# Altium PCB EpicPlus.PcbDoc
Units mil, origin at the board's own origin, x right, y up, seen from the top; angles counter-clockwise.
Board outline 2600 x 2000 mil, 4 copper layers (Top Layer, GND, PWR, Bottom Layer); 62 components, 102 nets, 280 pads, 141 vias.
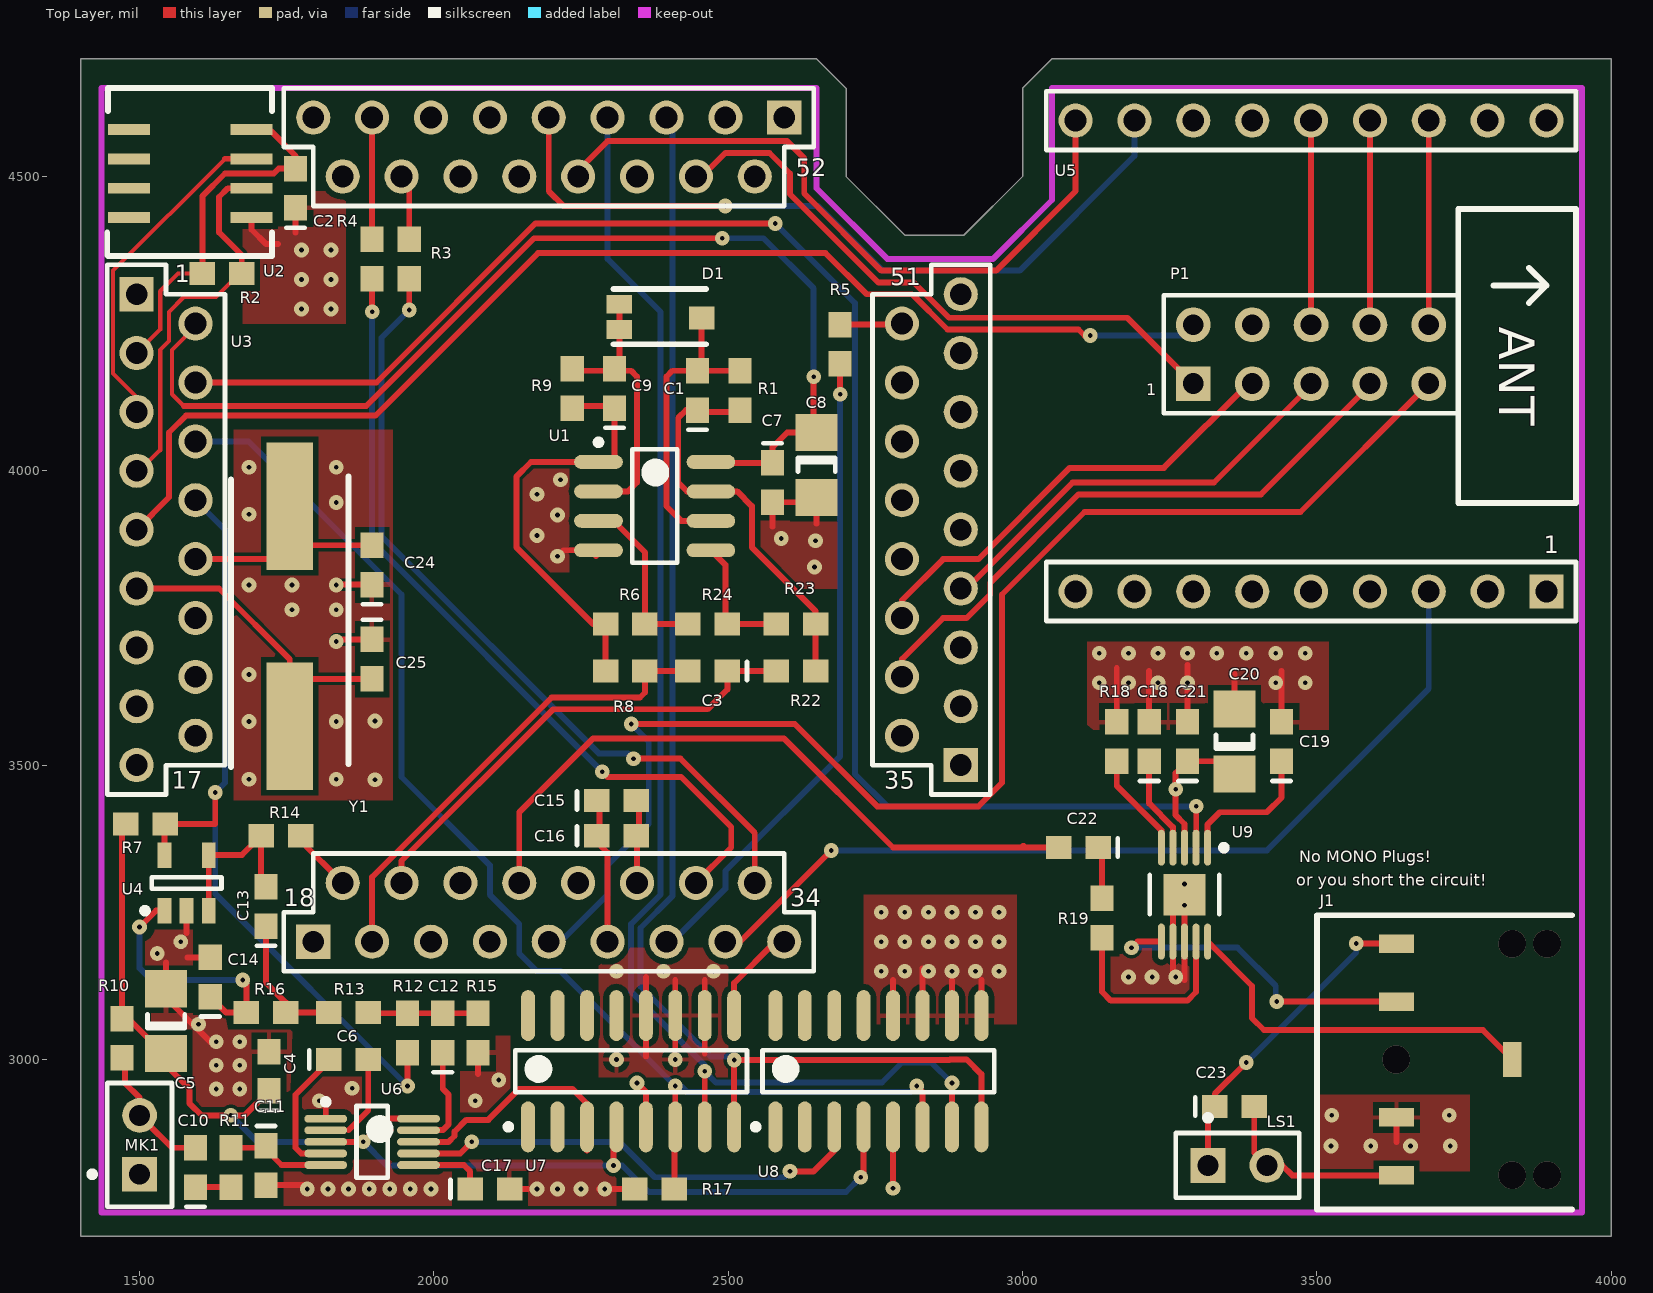
[diagram p0: Top Layer view]
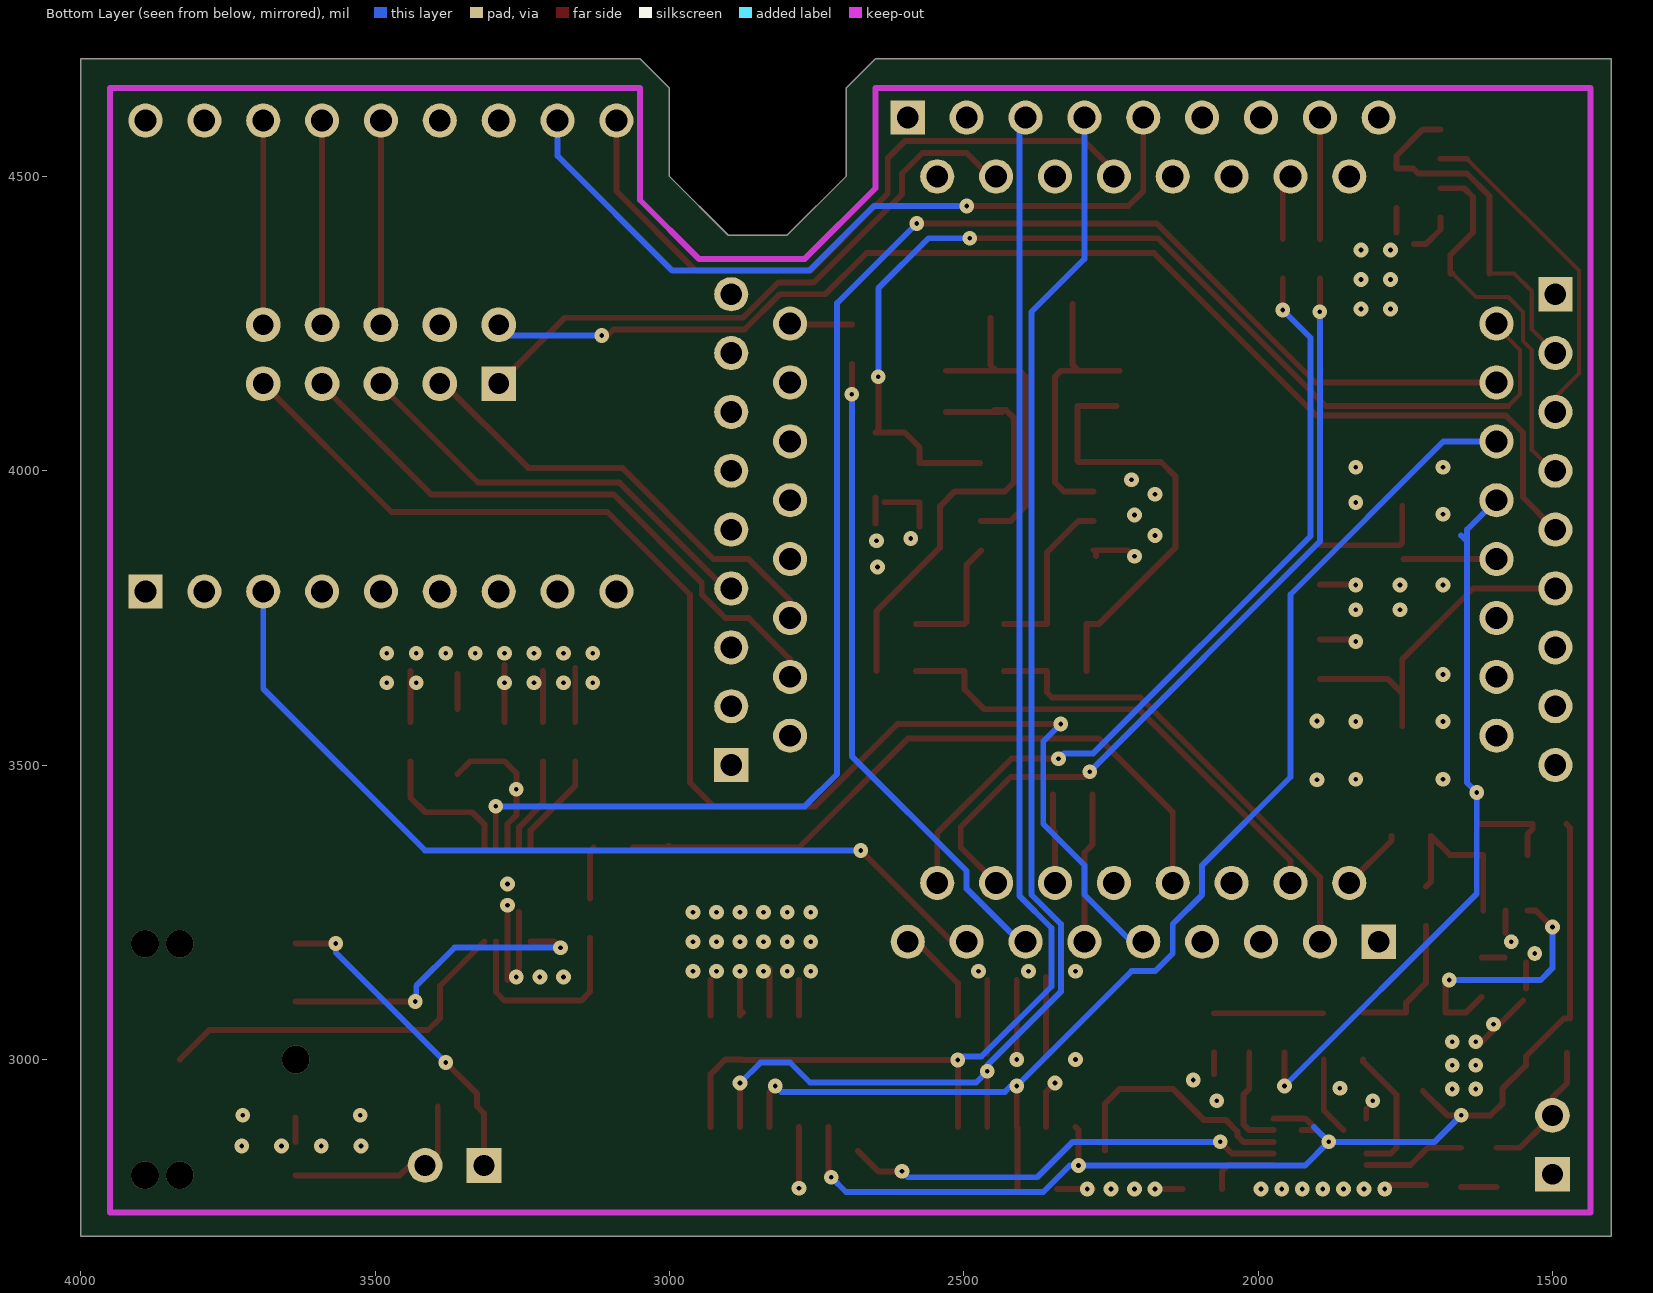
[diagram p1: Bottom Layer view, seen from below]
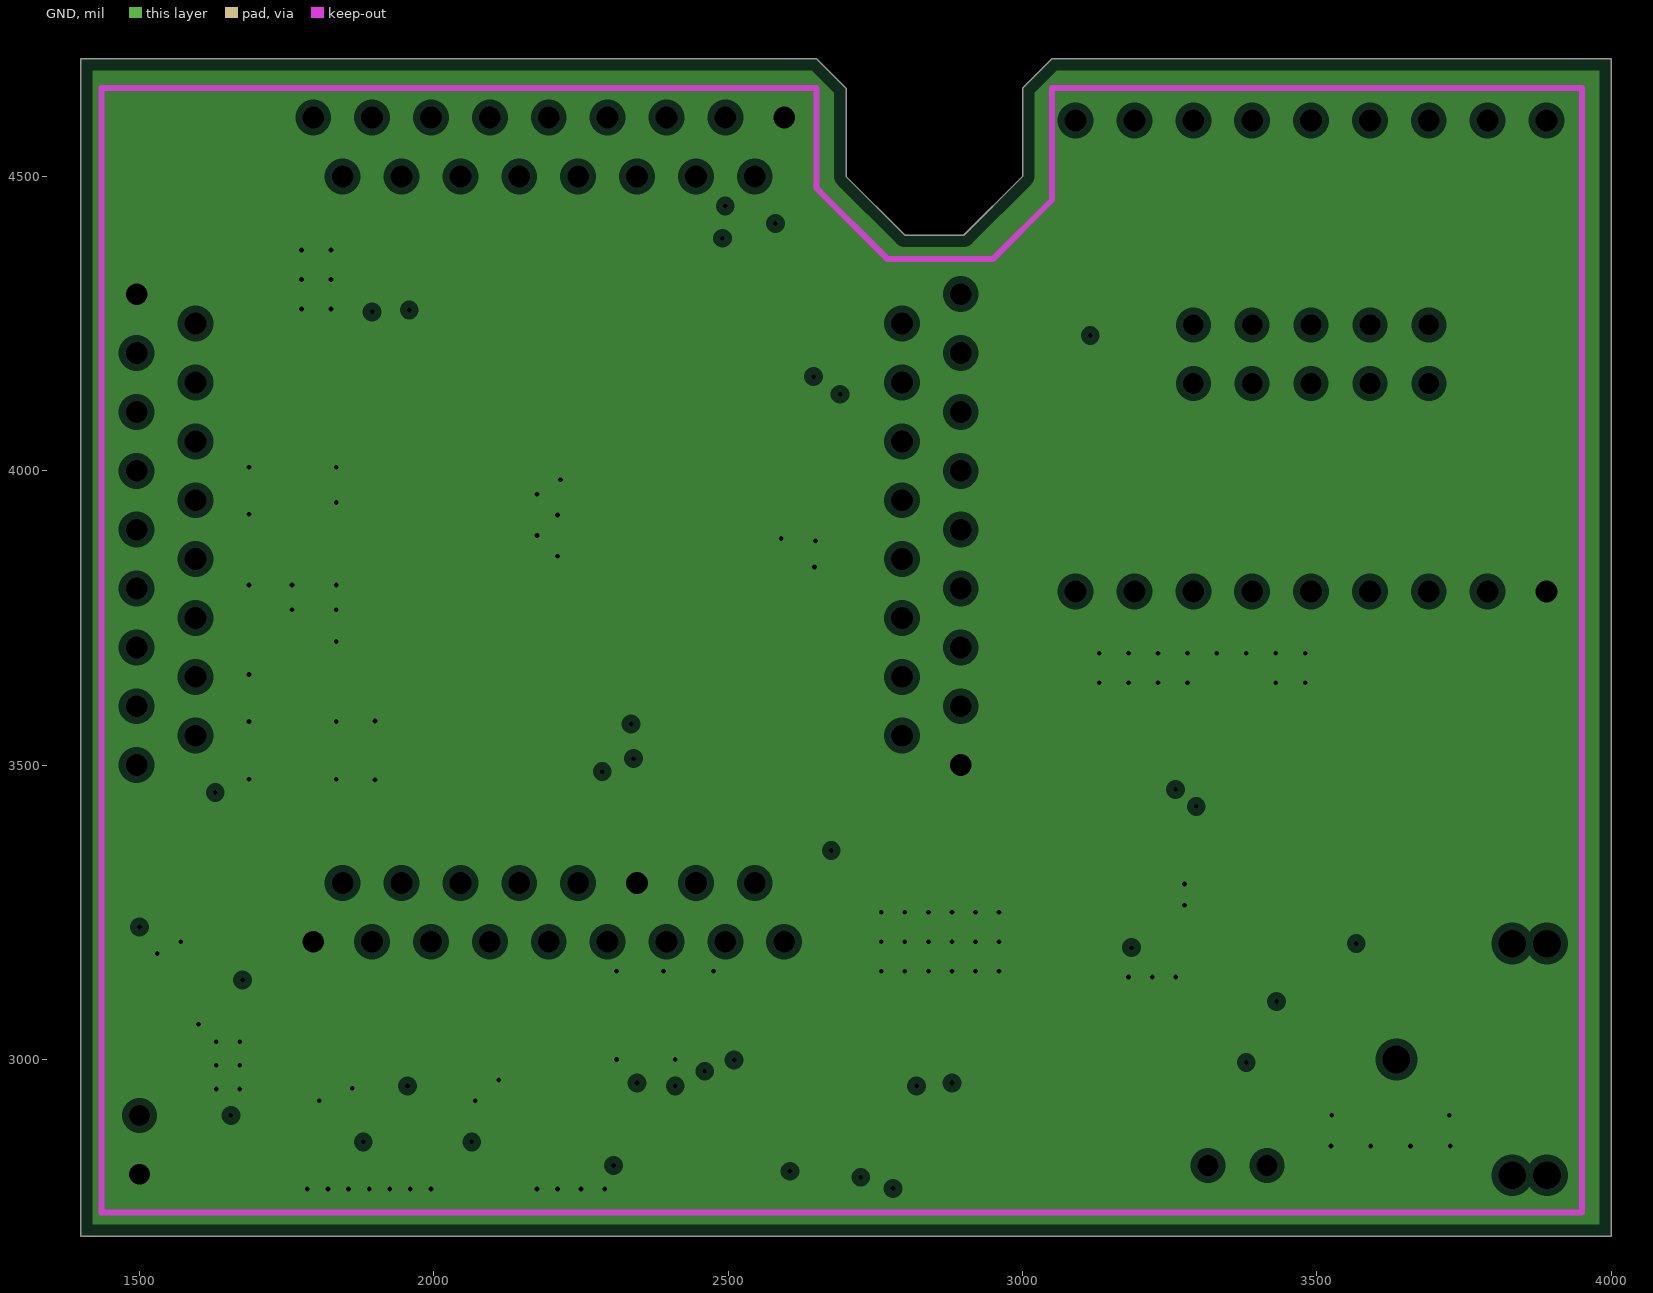
[diagram p2: GND, clearances drawn from the general rule]
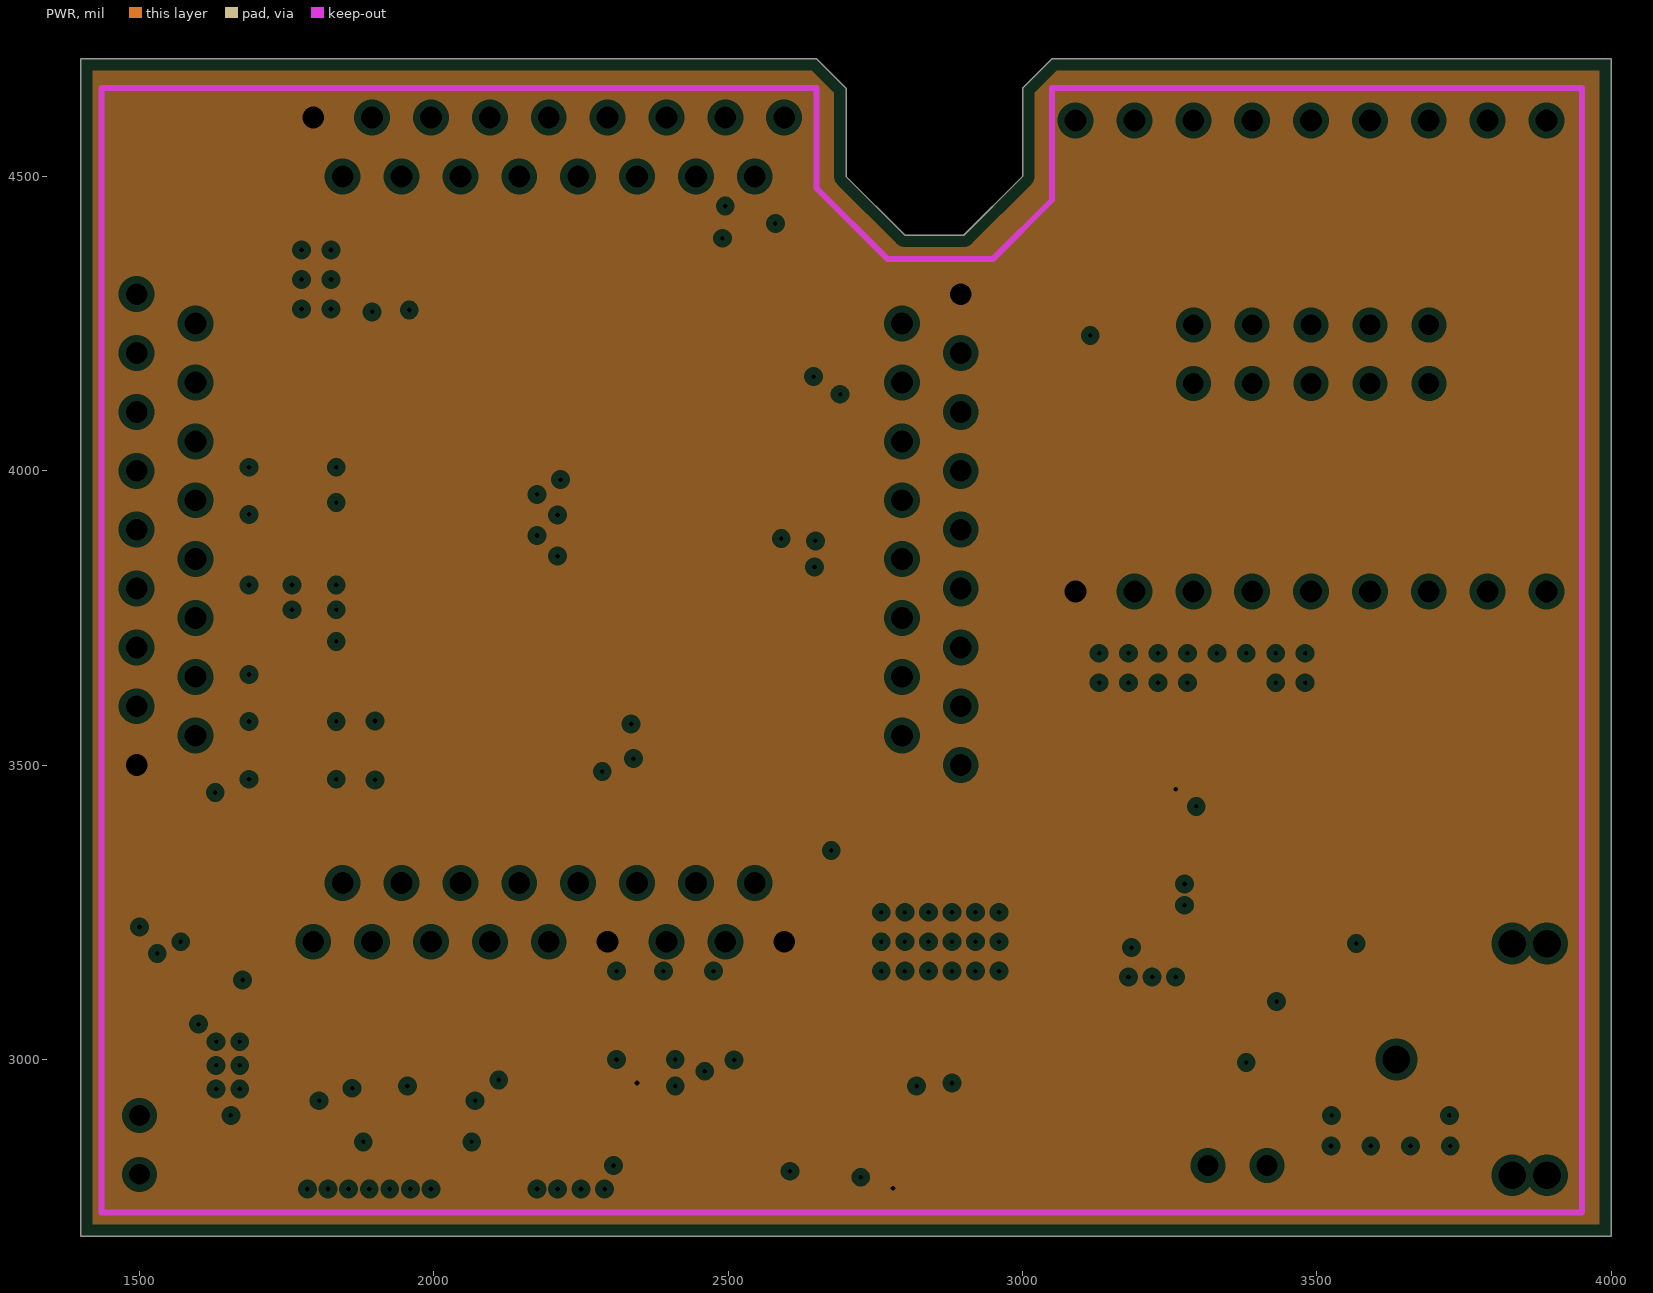
[diagram p3: PWR, clearances drawn from the general rule]

## Layer stack, top to bottom
Top Layer: signal copper 1.4
Dielectric: core 12.6, FR-4, Dk 4.8
GND: plane copper 1.4, net GND
Dielectric: prepreg 12.6, FR-4, Dk 4.8
PWR: plane copper 1.4, net AVDD_EPIC
Dielectric: core 12.6, FR-4, Dk 4.8
Bottom Layer: signal copper 1.4

## Board outline
1400,2700 1400,4700 2650,4700 2700,4650 2700,4500 2800,4400 2900,4400 3000,4500 3000,4650 3050,4700 4000,4700 4000,2700

## Design rules (kind name [scope] priority, off if disabled: settings)
Clearance "Clearance Polygon" [InPolygon vs isPad] p1: gap=10
Clearance "Clearance~Sunstone Circuits" [All] p2: gap=6 // Sunstone Circuits Minimum Clearance Rule (MLB~4&6 Layer Designs)
ComponentClearance [All] p1: gap=10 collisioncheckmode=3 verticalgap=10
HoleSize "HoleSize~Sunstone Circuits" [All] p1: absolutevalues=TRUE maxlimit=251 minlimit=8 maxpercent=80.000 minpercent=20.000 // Sunstone Circuits Hole Size Rule (MLB~4&6 Layer Designs)
MinimumAnnularRing "MinimumAnnularRing~Sunstone Circuits" [All] p1: minimumring=7 // Sunstone Circuits Minimum Annular Ring (MLB~4&6 Layer Designs)
PlaneClearance "PlaneClearance~Sunstone Circuits" [All] p1: clearance=12 // Sunstone Circuits Power Plane Clearance Rule (MLB~4&6 Layer Designs)
PlaneConnect "PlaneConnect~Sunstone Circuits" [All] p1: planeconnectstyle=Relief reliefexpansion=10 reliefentries=4 reliefconductorwidth=8 reliefairgap=10 // Sunstone Circuits Power Plane Connect Rule (MLB~4&6 Layer Designs)
PolygonConnect [isVia] p1: connectstyle=Direct reliefconductorwidth=10 reliefentries=4 polygonreliefangle="90 Angle"
PolygonConnect "PolygonConnect~Sunstone Circuits" [All] p2: connectstyle=Relief reliefconductorwidth=8 reliefentries=4 polygonreliefangle="90 Angle" // Sunstone Circuits Polygon Connect Style (MLB~4&6 Layer Designs)
RoomDefinition MainBoard [InComponentClass('MainBoard')] p1: confinementstyle=ConfineIn formatcopy=TRUE lockcomponents=FALSE outline 1300,2600 4085,2600 4085,4755 1300,4755
RoutingVias "RoutingVias~Sunstone Circuits" [All] p1: holewidth=8 width=25 viastyle="Through Hole" minholewidth=8 minwidth=24 maxholewidth=20 maxwidth=40 // Sunstone Circuits Routing Vias Rule (MLB~4&6 Layer Designs)
ShortCircuit "ShortCircuit~Sunstone Circuits" [All] p1: allowed=FALSE // Sunstone Circuits Short Circuit Rule~Do Not Allow (MLB~4&6 Layer Designs)
SolderMaskExpansion "SolderMaskExpansion~Sunstone Circuits" [All] p1: expansion=3 // Sunstone Circuits Solder Mask Expansion Rule (MLB~4&6 Layer Designs)
TestPointUsage [All] p1: valid=0 allowmultiple=FALSE
Testpoint [All] p1: side=15 testpointundercomponent=TRUE minsize=40 maxsize=100 preferedsize=60 minholesize=0 maxholesize=40 preferedholesize=32 testpointgrid=1 style=1023 order=0-112345678
ViasUnderSMD "ViasUnderSMD~Sunstone Circuits" [All] p1: allowed=FALSE // Sunstone Circuits Vias Under SMD~Do Not Allow (MLB~4&6 Layer Designs)
Width "Width~Sunstone Circuits" [All] p1: maxlimit=100 minlimit=6 preferedwidth=10 // Sunstone Circuits Minimum Width Rule (MLB~4&6 Layer Designs)
14 further rules are at their usual default settings.

## Components (designator, comment, footprint, x,y, rotation, side; value= is the part's Value field where it differs from the comment)
C1 "Cap" CC1608-0603 2448,4136.54 r90 top
C2 "Cap" CC1608-0603 1765,4480 r90 top
C3 "Cap" CC1608-0603 2465,3660 r180 top
C4 "Cap" CC1608-0603 1720,2980 r90 top
C5 "Cap2" CC3216-1206 1545,3065 r90 top
C6 "Cap2" CC1608-0603 1855,3000 r0 top
C7 "Cap" CC1608-0603 2575,3980 r270 top
C8 "Cap2" CC3216-1206 2650,4010 r270 top
C9 "Cap" CC1608-0603 2307,4140 r90 top
C10 "Cap" CC1608-0603 1595,2816.54 r90 top
C11 "Cap" CC1608-0603 1715,2820 r270 top
C12 "Cap2" CC1608-0603 2015,3045 r90 top
C13 "Cap" CC1608-0603 1715,3260 r90 top
C14 "Cap" CC1608-0603 1620,3140 r90 top
C15 "Cap" CC1608-0603 2310,3440 r0 top
C16 "Cap2" CC1608-0603 2310,3380 r0 top
C17 "Cap2" CC1608-0603 2095,2780 r0 top
C18 "Cap2" CC1608-0603 3215,3540 r90 top
C19 "Cap2" CC1608-0603 3440,3540 r90 top
C20 "Cap2" CC3216-1206 3360,3540 r90 top
C21 "Cap" CC1608-0603 3280,3540 r90 top
C22 "Cap" CC1608-0603 3095,3360 r180 top
C23 "Cap" CC1608-0603 3360,2920 r0 top
C24 "Cap" CC1608-0603 1895,3840 r90 top
C25 "Cap" CC1608-0603 1895,3680 r270 top
D1 "VISHAY/TEMD6010FX01" VISHAY/TEMD6010FX01 2315,4240 r0 top
J1 "CUI/SJ1-3525NG" CUI/PHONE_JACK_3.5mm 3635,3000 r180 top
LS1 "Speaker" PIN2 3315,2820 r0 top
MK1 "Mic2" PIN2 1500,2805 r90 top
P1 "Header 5X2" HDR2X5 3290,4148 r0 top
R1 "Res3" CR1608-0603 2520,4136.54 r270 top
R2 "Res3" CR1608-0603 1640,4335 r0 top
R3 "Res3" CR1608-0603 1958,4360 r90 top
R4 "Res3" CR1608-0603 1895,4360 r270 top
R5 "Res3" CR1608-0603 2690,4215 r270 top
R6 "Res3" CR1608-0603 2325,3740 r0 top
R7 "Res3" CR1608-0603 1510,3400 r0 top
R8 "Res3" CR1608-0603 2325,3660 r180 top
R9 "Res3" CR1608-0603 2235,4140 r270 top
R10 "Res3" CR1608-0603 1470,3036 r270 top
R11 "Res3" CR1608-0603 1655,2816.54 r270 top
R12 "Res3" CR1608-0603 1955,3045 r90 top
R13 "Res3" CR1608-0603 1855,3080 r180 top
R14 "Res3" CR1608-0603 1740,3380 r0 top
R15 "Res3" CR1608-0603 2075,3045 r270 top
R16 "Res3" CR1608-0603 1715,3080 r180 top
R17 "Res3" CR1608-0603 2375,2780 r180 top
R18 "Res3" CR1608-0603 3160,3540 r270 top
R19 "Res3" CR1608-0603 3135,3240 r270 top
R22 "Res3" CR1608-0603 2615,3660 r0 top
R23 "Res3" CR1608-0603 2615,3740 r180 top
R24 "Res3" CR1608-0603 2465,3740 r0 top
U1 "Microchip/MCP6042" SOIC127P600X175-8N 2375,3940 r0 top
U2 "SHT11" Sensirion/SHT11 1690,4580 r180 top
U3 "Epic Mote Compact" UCB/Epic_Quanto_Header 1445,4350 r0 top
U4 "LMV321M5" SOT23127P600-8N 1580,3300 r90 top
U5 "SparkFun/Breakout_WRL-084" SparkFun/Breakout_WRL-084 3940,4645 r180 top
U6 "AD/SSM2167" MSOP127P600-8N 1895,2860 r0 top
U7 "AD/AD5242" SOIC127P600X175-16N 2335,2980 r90 top
U8 "AD/AD5242" SOIC127P600X175-16N 2755,2980 r90 top
U9 "TI/TPA0233" TSSOP50P480X107_HS-10N 3275,3280 r270 top
Y1 "CRYSTAL_0" ECS/CSM-7SSX 1755,3940 r270 top

## Footprints (in the part's own frame and the unit in brackets; to place one, negate y for a bottom-side part, rotate by r counter-clockwise, add the part's x,y. Pads: shape width x height; smd on the part's side, far side on the other; paste and mask are expansions set on the pad)
CC1608-0603 [mm] "Chip Capacitor; Body 1.6 x 0.8 mm (LxW typ)"
  rect 1.1x1 smd: 1(-0.85,0) 2(0.85,0)
  silkscreen extent -1.7,-0.4 -1.7,0.4
CC3216-1206 [mm] "Chip Capacitor; Body 3.2 x 1.6 mm (LxW typ)"
  rect 1.6x1.8 smd: 1(-1.4,0) 2(1.4,0)
  silkscreen extent -0.3,-0.8 0.3,0.8
CR1608-0603 [mm] "Chip Resistor; Body 1.6 x 0.8 mm (LxW typ)"
  rect 1.1x1 smd: 1(-0.85,0) 2(0.85,0)
CUI/PHONE_JACK_3.5mm [mm] "3.5mm Audio Jack Stereo"
  rect 0.8x1.5 smd: 1(-5,0)
  rect 1.5x0.8 smd: 2(0,-5) 3(0,5) 4(0,-2.5) 5(0,2.5)
  silkscreen extent -7.57,-6.22 3.43,6.48
ECS/CSM-7SSX [mm] "Low Profile SMD Crystal from ECS"
  rect 5.5x2 smd: 1(0,0) 2(9.5,0)
  silkscreen extent -1.27,-2.54 11.26,2.54
HDR2X5 [mm] "Connector; Header; 5x2 Position"
  rect 1.5x1.5 hole 0.9: 1(0,0)
  round 1.5 hole 0.9: 2(0,2.54) 3(2.54,0) 4(2.54,2.54) 5(5.08,0) 6(5.08,2.54) 7(7.62,0) 8(7.62,2.54) 9(10.16,0) 10(10.16,2.54)
  silkscreen extent -1.27,-1.27 11.43,3.81
MSOP127P600-8N [mm] "For AD SSM2167"
  oval 1.85x0.332 smd: 1(-2,1) 2(-2,0.5) 3(-2,0) 4(-2,-0.5) 5(-2,-1) 6(2,-1) 7(2,-0.5) 8(2,0) 9(2,0.5) 10(2,1)
  silkscreen extent -2.12,-1.55 0.67,1.85, body extent -1.55,-1.55 1.55,1.55, height 1.1
PIN2 [mm] "Photosensitive Diode; 2 Leads"
  rect 1.5x1.5 hole 0.9: 1(0,0)
  round 1.5 hole 0.9: 2(2.54,0)
  silkscreen extent -1.4,-1.4 3.94,2.17
Sensirion/SHT11 [mm] "Sensirion SHT11 footprint"
  rect 1.8x0.47 smd: 1(0,3.81) 2(0,2.54) 3(0,1.27) 4(0,0) NC(5.28,3.81) NC(5.28,0) NC(5.28,1.27) NC(5.28,2.54)
  silkscreen extent -0.89,-1.78 6.22,5.46
SOIC127P600X175-8N [mm] "SOIC, 8-Leads, Body 4.9x3.9mm (max), Pitch 1.27mm, IPC Medium Density, for Microchip MCP6042"
  oval 2.1x0.6 smd: 1(-2.425,1.905) 2(-2.425,0.635) 3(-2.425,-0.635) 4(-2.425,-1.905) 5(2.425,-1.905) 6(2.425,-0.635) 7(2.425,0.635) 8(2.425,1.905)
  silkscreen extent -2.55,-2.45 0.98,2.88, body extent -1.95,-2.45 1.95,2.45, height 1.75
SOIC127P600X175-16N [mm] "SOIC, 16-Leads, Body 10.0x4.0mm (max), Pitch 1.27mm, IPC Medium Density, AD5242"
  oval 2.2x0.6 smd: 1(-2.4,4.445) 2(-2.4,3.175) 3(-2.4,1.905) 4(-2.4,0.635) 5(-2.4,-0.635) 6(-2.4,-1.905) 7(-2.4,-3.175) 8(-2.4,-4.445) 9(2.4,-4.445) 10(2.4,-3.175) 11(2.4,-1.905) 12(2.4,-0.635) 13(2.4,0.635) 14(2.4,1.905) 15(2.4,3.175) 16(2.4,4.445)
  silkscreen extent -2.52,-5 0.9,5.42, body extent -2,-5 2,5, height 1.75
SOT23127P600-8N [mm] "for TI LMV931 SOT-23-DBV package"
  rect 1.1x0.6 smd: 1(-1.2,0.95) 2(-1.2,0) 3(-1.2,-0.95) 4(1.2,-0.95) 5(1.2,0.95)
  silkscreen extent -1.32,-1.5 0.25,1.92, body extent -0.87,-1.52 0.87,1.53, height 1.45
SparkFun/Breakout_WRL-084 [mil] "Two 9 pin headers, 800mil spacing for SparkFun WRL-084 bluetooth module"
  rect 58x58 / inner round 60 / far side rect 58x58 hole 37: 1(50,850)
  round 58 / inner round 60 / far side round 58 hole 37: 2(150,850) 3(250,850) 4(350,850) 5(450,850) 6(550,850) 7(650,850) 8(750,850) 9(850,850) 10(850,50) 11(750,50) 12(650,50) 13(550,50) 14(450,50) 15(350,50) 16(250,50) 17(150,50) 18(50,50)
  silkscreen extent 0,0 900,900
TSSOP50P480X107_HS-10N [mm] "TSSOP, 10-Leads, Body 3.0x3.0mm (max), Pitch 0.50mm, IPC Medium Density, for TI/TPA0233"
  oval 1.55x0.3 smd: 1(-2.025,1) 2(-2.025,0.5) 3(-2.025,0) 4(-2.025,-0.5) 5(-2.025,-1) 6(2.025,-1) 7(2.025,-0.5) 8(2.025,0) 9(2.025,0.5) 10(2.025,1)
  rect 1.8x1.8 smd: 11(0,0)
  silkscreen extent -2.15,-1.5 0.85,1.83, body extent -1.53,-1.53 1.53,1.53, height 1.07
UCB/Epic_Quanto_Header [mil] "Header to connect to the Epic Quanto Testbed Board"
  rect 58x58 / inner round 60 / far side rect 58x58 hole 37: 1(50,-50) 18(350,-1150) 35(1450,-850) 52(1150,250)
  round 58 / inner round 60 / far side round 58 hole 37: 2(150,-100) 3(50,-150) 4(150,-200) 5(50,-250) 6(150,-300) 7(50,-350) 8(150,-400) 9(50,-450) 10(150,-500) 11(50,-550) 12(150,-600) 13(50,-650) 14(150,-700) 15(50,-750) 16(150,-800) 17(50,-850) 19(400,-1050) 20(450,-1150) 21(500,-1050) 22(550,-1150) 23(600,-1050) 24(650,-1150) 25(700,-1050) 26(750,-1150) 27(800,-1050) 28(850,-1150) 29(900,-1050) 30(950,-1150) 31(1000,-1050) 32(1050,-1150) 33(1100,-1050) 34(1150,-1150) 36(1350,-800) 37(1450,-750) 38(1350,-700) 39(1450,-650) 40(1350,-600) 41(1450,-550) 42(1350,-500) 43(1450,-450) 44(1350,-400) 45(1450,-350) 46(1350,-300) 47(1450,-250) 48(1350,-200) 49(1450,-150) 50(1350,-100) 51(1450,-50) 53(1100,150) 54(1050,250) 55(1000,150) 56(950,250) 57(900,150) 58(850,250) 59(800,150) 60(750,250) 61(700,150) 62(650,250) 63(600,150) 64(550,250) 65(500,150) 66(450,250) 67(400,150) 68(350,250)
  silkscreen extent 0,-1200 1500,300
VISHAY/TEMD6010FX01 [mm] "Ambient Light Sensor"
  rect 1.1x0.8 smd: 1(0,0) 1(0,1.1)
  rect 1.1x1 smd: 2(3.55,0.5)
  silkscreen extent -0.25,-0.64 3.75,1.75

## Part data
C1 C2 C3 C4 C5 C6 C7 C8 C9 C10 C11 C12 C13 C14 C15 C16 C17 C18 C19 C20 C21 C22 C23 C24 C25: "Capacitor"
LS1: "Loudspeaker"
MK1: "Microphone"
P1: "Header, 5-Pin, Dual row"
R1 R2 R3 R4 R5 R6 R7 R8 R9 R10 R11 R12 R13 R14 R15 R16 R17 R18 R19 R22 R23 R24: "Resistor"
U4: "Single General-Purpose, Low-Voltage Rail-to-Rail Output Operational Amplifier"

## Free pads (board coordinates)
  round 25 hole 8: 13(1530,3180) 13(1570,3200)

## Via types
v1: diameter 25, hole 8, Top Layer to Bottom Layer, 136 vias
v2: diameter 47, hole 47, Top Layer to Bottom Layer, 5 vias

## Nets (pads, with @x,y where several pads share a name; then routed paths per layer and width w, separated by ;. In a path a pad name is that pad's centre, name@x,y a point inside that pad or via, vN(x,y) a via of type N, cw(c..) or ccw(c..) an arc to the next point about the centre after c; other vN are vias at no path point)
ADC0_EPIC: R14.2 U3.19 | length 109.6
  Top Layer w10: R14.2 1773.46,3371.54 U3.19
ADC1_EPIC: C3.2 R8.1 U3.20 | length 812.9
  Top Layer w10: U3.20 1895,3310 2200,3615 2350,3615 2358.46,3623.46 R8.1 C3.2
ADC2_EPIC: C3.1 R22.1 U3.21 | length 826
  Top Layer w10: U3.21 1945,3337.37 2202.63,3595 2465,3595 2498.46,3628.46 C3.1 R22.1
ADC3_EPIC: U3.22
ADC4_EPIC: U3.23
ADC5_EPIC: U3.24
ADC6_EPIC: C22.2 U3.25 | length 1165.9
  Top Layer w10: U3.25 2145,3420 2270,3545 2595,3545 2780,3360 C22.2 ; 3001,3363 3002,3363
ADC7_EPIC: P1.9 U3.26 | length 2362.4
  Top Layer w10: v1(2335,3570) 2613,3570 2753,3430 2925,3430 2965,3470 2965,3790 3105,3930 3472,3930 P1.9
  Bottom Layer w10: U3.26 2215,3200 2295,3280 2295,3330 2365,3400 2365,3540 v1(2335,3570)
ATEST1_EPIC: U3.46
ATEST2_EPIC: U3.47
AVDD_EPIC: C15.1 C16.1 C20.1 C21.1 U3.17 U3.28 U3.34 U3.51 U3.68 U5.9 U7.5 U7.9 U8.5 U9.3 | length 860.6
  Top Layer w10: C15.1@2281.54,3450 2281.54,3440 2281.54,3380 2281.54,3365 2295,3351.54 U3.28 ; v1(2345,2960) 2360,2945 U7.5 ; U7.9 2510,3130 2580,3200 U3.34 ; v1(2780,2781) U8.5 ; U9.3 3275,3400 3260,3415 3260,3486.54 C21.1 3338.35,3506.54 C20.1
  other v1: 3260,3458.88
CTS_BT: U5.13
FLASH_CS_EPIC: U3.36
FLASH_WP_EPIC: U3.37
GND: C2.1 C4.2 C5.2 C7.2 C8.2 C11.2 C14.2 C15.2 C16.2 C17.2 C18.2 C19.2 C20.2 C21.2 C24.1 C25.1 J1.5 MK1.1 pad.13 R15.2 R17.2 R18.1 U1.4 U2.1 U3.1 U3.18 U3.29 U3.35 U3.52 U4.2 U5.1 U6.1 U7.10 U7.11 U7.12 U8.9 U8.10 U8.11 U8.12 U9.7 U9.8 U9.11 | length 2385.6
  Top Layer w10: C5.2 1545,3165 ; C5.2@1550,3100 v1@1620,3030 ; 1580,3215 U4.2 ; 1581.54,3173.46 C14.2 ; U2.1 1690,4410 1715,4385 1735,4385 ; C11.2 v1@1778.46,2786.54 ; 1765,4405 C2.1 ; U6.1 1816.26,2916.26 ; v1@1833.46,3713.46 C25.1 ; v1@1833.46,3806.54 C24.1 ; 2075,2975 R15.2 ; C17.2 2160,2780 ; 2220,3865 U1.4 ; U1.4@2275,3855 U1.4@2275,3860.47 ; v1@2280,2780 R17.2 ; U3.29 2345,3386.54 2348.46,3390 C15.2@2348.46,3450 ; 2360,3005 2360,3140 ; v1(2410,3000) 2410,3135 ; 2460,3010 2460,3135 ; 2575,3905 C7.2 C8.2@2635,3946.54 ; 2650,3910 C8.2 ; U8.12 2780,3135 ; U8.11 v1@2830,3155 ; U8.10@2875,3079.49 U8.10@2880,3084.49 ; U8.10 2880,3135 ; U8.9 2930,3135 ; R18.1 3160,3665 ; C18.2 3215,3660 ; v1@3255.32,3135.32 U9.11@3255.32,3250.32 ; 3275,3135 U9.11@3275,3246 ; C21.2 3280,3670 ; C20.2 3360,3655 ; C19.2 3440,3660 ; 3635,2860 J1.5
  other v1: 1785,2780 1820,2780 1855,2780 1890,2780 1925,2780 1960,2780 1995,2780 2175,2780 2210,2780 2250,2780 2290,2780 3524,2853 3591.5,2853 3659,2853 3726.5,2853 3525,2905 3725,2905 1805,2930 2070,2930 1630,2950 1670,2950 1861,2951 2110,2965 1630,2990 1670,2990 2310,3000 1630,3030 1670,3030 1600,3060 3180,3140 3220,3140 3260,3140 2310,3150 2390,3150 2475,3150 2760,3150 2800,3150 2840,3150 2880,3150 2920,3150 2960,3150 2760,3200 2800,3200 2840,3200 2880,3200 2920,3200 2960,3200 2760,3250 2800,3250 2840,3250 2880,3250 2920,3250 2960,3250 3275,3262 3275,3298 1900,3475 1686,3476 1834,3476 1686,3574 1834,3574 1900,3575 3130,3640 3180,3640 3230,3640 3280,3640 3430,3640 3480,3640 1686,3654 3130,3690 3180,3690 3230,3690 3280,3690 3330,3690 3380,3690 3430,3690 3480,3690 1834,3709.99 1759,3764 1834,3764 1686,3806 1759,3806 1834,3806 2646.66,3836.66 2210,3855 2648.07,3881 2590,3885 2175,3890 2210,3925 1686,3926 1834,3946 2175,3960 2215,3985 1686,4006 1834,4006 1775,4275 1825,4275 1775,4325 1825,4325 1775,4375 1825,4375
HUM_ON: C2.2 R2.1 U2.4 U3.3 | length 630.1
  Top Layer w7: U3.3 1535,4240 1535,4305 1565,4335 R2.1
  Top Layer w10: R2.1 1606.54,4466.54 1645,4505 1727.97,4505 1736.43,4513.46 C2.2 1765,4535 1720,4580 U2.4
HUM_SCL: U2.3 U3.5 | length 572.3
  Top Layer w7: U3.5@1500,4100 1500,4120 1455,4165 1455,4340 1645,4530
  Top Layer w10: 1645,4530 U2.3
HUM_SDA: R2.2 U2.2 U3.7 | length 648.2
  Top Layer w7: U3.7@1500,4000 1535,4035 1535,4205.51 1550,4220.51 1550,4270 1575,4295 1630,4295 R2.2@1670,4335
  Top Layer w10: R2.2@1670,4335 R2.2 1673.46,4366.54 1635,4405 1635,4465 1650,4480 U2.2
I2C0/SPI0_EPIC: U3.53
LED1_EPIC: R3.2 U3.65 | length 111.9
  Top Layer w10: U3.65 1958,4487 R3.2
LED2_EPIC: R4.1 U3.66 | length 206.5
  Top Layer w10: R4.1 U3.66
LED3_EPIC: U3.67
MIC_ON: R7.2 R12.1 U3.8 U4.5 | length 1433.5
  Top Layer w10: U4.5 1542.6,3382.4 1533.46,3391.54 1533.46,3400 1628.46,3400 v1(1628.46,3453.46) ; v1(1955,2955) R12.1
  Bottom Layer w10: U3.8 1645,3900 1645,3470 v1(1628.46,3453.46) 1628.46,3281.54 v1(1955,2955) ; 1645,3880 1655,3890
MIC_POWER: C4.1 C5.1 R7.1 R10.1 U6.3 U6.10 U7.4 U8.4 | length 2212.4
  Top Layer w10: R10.1 1470,3393.46 R7.1 ; R10.1@1475,3069.47 1480.54,3069.47 1545.12,3004.88 1545.12,2989.88 1585,2950 1585,2925 1605,2905 1678.46,2905 C4.1 ; U6.3 v1(1880,2860) 1920,2900 1973.11,2900 U6.10 ; 1900,2880 1926.33,2880 ; v1(2305,2820) 2305,2880.51 U7.4 ; v1(2725,2800) 2730,2805 U8.4
  Bottom Layer w10: v1(1655,2905) 1700,2860 v1(1880,2860) ; 1905,2885 v1(1880,2860) ; v1(2725,2800) 2700,2775 2365,2775 2320,2820 1920,2820 v1(1880,2860)
MISO0_EPIC: U3.57
MOSI0/SDA_EPIC: U3.56 U7.8 U8.8 | length 2330.4
  Top Layer w10: U7.8 v1(2510,2999) 2876,2999 2877,3000 2905,3000 2930,2975 U8.8
  Bottom Layer w10: U3.56@2405,4590 2405,3277.37 2351,3223.37 2351,3124 2470,3005 v1@2510,3005
NetC1_1: C1.1 R1.2 R22.2 R23.1 U1.7 | length 709.9
  Top Layer w10: C1.1@2435,4100 R1.2@2530,4100 ; C1.1 2428.07,4103.07 2415,4090 2415,3980 2430,3965 2515,3965 2540,3940 2540,3870 2648.46,3761.54 R22.2
NetC1_2: C1.2 D1.2 R1.1 U1.6 | length 538.7
  Top Layer w10: C1.2@2445,4170 2454.76,4179.76 D1.2 ; U1.6 2420,3915 2395,3940 2395,4160 2405,4170 R1.1@2530,4170
NetC6_1: C6.1 U6.4 | length 228.7
  Top Layer w10: U6.4 1774.68,2840.32 1765,2850 1765,2940 1821.54,2996.54 C6.1
NetC6_2: C6.2 U6.2 | length 133.9
  Top Layer w10: 1855,2880 1888.46,2913.46 C6.2
NetC9_1: C9.1 R6.1 R8.2 R9.2 U1.1 | length 743.4
  Top Layer w10: R9.2@2240,4110 2307,4110 2307,4017 2305,4015 U1.1 ; U1.1@2279.43,4014.9 2164.9,4014.9 2140,3990 2140,3870 2270,3740 R6.1 R8.2
NetC9_2: C9.2 D1.1 R9.1 U1.2 | length 483.3
  Top Layer w10: R9.1@2235,4170 2335,4170 2345,4160 2345,3980 2330,3965 U1.2 ; C9.2@2305,4170 2315,4180 2315,4240 D1.1@2315,4283.31
NetC10_1: C10.1 R11.2 | length 60
  Top Layer w10: C10.1 R11.2
NetC10_2: C10.2 MK1.2 R10.2 | length 234.2
  Top Layer w10: R10.2@1475,3011.1 1475,2960 1500,2935 MK1.2 1511.54,2893.46 1555,2850 C10.2
NetC11_1: C11.1 R11.1 U6.5 | length 173.4
  Top Layer w10: R11.1 1711.54,2850 1740.91,2820.63 U6.5
NetC12_1: C12.1 U6.9 | length 180.8
  Top Layer w10: U6.9@1974.05,2880 2015,2880 2025,2890 2025,2940 2015,2950 C12.1
NetC12_2: C12.2 R12.2 R13.1 R15.1 | length 185
  Top Layer w10: R13.1@1890,3078.46 R15.1
NetC13_1: C13.1 R13.2 R16.1 | length 233.5
  Top Layer w10: C13.1 1715,3130 1748.46,3096.54 R16.1 R13.2
NetC13_2: C13.2 R14.1 U4.3 U4.4 | length 287.2
  Top Layer w10: U4.3 U4.4 1673.78,3347.24 R14.1 1706.54,3301.93 C13.2
NetC14_1: C14.1 R16.2 U4.1 | length 437.6
  Top Layer w10: v1(1500,3225) 1527.76,3252.76 U4.1 ; C14.1 1646.54,3080 R16.2 1681.54,3128.46 v1(1675,3135)
  Bottom Layer w10: v1(1500,3225) 1500,3155 1520,3135 v1(1675,3135)
NetC17_1: C17.1 U6.6 | length 122.2
  Top Layer w10: U6.6 2050.91,2820.63 2061.54,2810 C17.1
NetC18_1: C18.1 U9.4 | length 163.5
  Top Layer w10: C18.1 3215,3435 3255.32,3394.68 U9.4
NetC19_1: C19.1 U9.1 | length 245.7
  Top Layer w10: U9.1 3314.37,3399.37 3335,3420 3415,3420 3440,3445 C19.1
NetC22_1: C22.1 R19.1 | length 89.2
  Top Layer w10: C22.1 3135,3353.46 R19.1
NetC23_1: C23.1 J1.2 LS1.1 | length 549.3
  Top Layer w10: LS1.1 3315,2908.46 C23.1 3326.54,2941.54 v1(3380,2995) ; v1(3566.85,3196.85) J1.2@3635,3196.85
  Bottom Layer w10: v1(3380,2995) 3566.85,3181.85 v1(3566.85,3196.85)
NetC23_2: C23.2 J1.3 LS1.2 | length 335.9
  Top Layer w10: C23.2 3393.46,2841.54 LS1.2 3441.3,2820 3458.15,2803.15 J1.3@3635,2803.15
NetJ1_1: J1.1 U9.10 | length 632.4
  Top Layer w10: U9.10 3389.82,3124.82 3389.82,3070.18 3410,3050 3781.85,3050 J1.1@3831.85,3000
NetJ1_4: J1.4 U9.6 | length 557.5
  Top Layer w10: v1(3185,3190) 3195.28,3200.28 U9.6 ; v1(3431.57,3098.43) J1.4
  Bottom Layer w10: v1(3185,3190) 3365,3190 3430,3125 3430,3100 v1(3431.57,3098.43)
NetR6_2: R6.2 R24.1 U1.3 | length 295.7
  Top Layer w10: U1.3 2305,3915 2358.46,3861.54 R6.2 R24.1
NetR18_2: R18.2 U9.5 | length 178.1
  Top Layer w10: R18.2 3160,3465 3235.63,3389.37 U9.5
NetR19_2: R19.2 U9.9 | length 349.1
  Top Layer w10: R19.2 3135,3115 3150,3100 3280,3100 3294.69,3114.69 U9.9
NetR23_2: R23.2 R24.2 U1.5 | length 214.8
  Top Layer w10: U1.5 2495,3840.47 R24.2@2495,3743.46 ; R24.2 R23.2
ONEWIRE_EPIC: U3.54
P1.2_EPIC: R5.2 U3.30 | length 1099.6
  Top Layer w10: v1(2690,4130) R5.2
  Bottom Layer w10: U3.30@2405,3200 2495,3290 2495,3320 2690,3515 v1(2690,4130)
P1.5_EPIC: R4.2 U3.31 | length 1377.3
  Top Layer w10: v1(1895,4270) R4.2 ; v1(2286,3489) 2295,3480 2420,3480 2505,3395 2505,3360 U3.31
  Bottom Layer w10: v1(1895,4270) 1895,3880 v1(2286,3489)
P1.6_EPIC: U3.32 U5.3 | length 1538.1
  Top Layer w10: U3.32 2520,3200 v1(2675,3355)
  Bottom Layer w10: v1(2675,3355) 3415,3355 3690,3630 U5.3
P1.7_EPIC: R3.1 U3.33 | length 1384.8
  Top Layer w10: v1(1958,4273) R3.1 ; v1(2339,3511) 2419,3511 2545,3385 U3.33
  Bottom Layer w10: v1(1958,4273) 1911,4226 1911,3889 2280,3520 2330,3520 v1(2339,3511)
P2.0_EPIC: P1.7 U3.38 | length 1033.6
  Top Layer w10: U3.38 2795,3680 2865,3750 2905,3750 2945,3790 2945,3810 3095,3960 3405,3960 3591.5,4146.5 P1.7
P2.1_EPIC: U3.39
P2.3_EPIC: P1.3 U3.40 | length 780.3
  Top Layer w10: U3.40 2795,3780 2865,3850 2925,3850 3080,4005 3240,4005 3386.5,4151.5 P1.3
P2.6_EPIC: P1.5 U3.41 | length 745
  Top Layer w10: U3.41 2905,3800 3085,3980 3325,3980 3491.5,4146.5 P1.5@3495,4150
P5.0_EPIC: C7.1 C8.1 U1.8 U3.2 | length 1843.5
  Top Layer w7: 1575,4110 1555,4130 1555,4205 U3.2@1595,4245
  Top Layer w10: 1575,4110 1885,4110 2170,4395 v1(2490,4395) ; U3.2@1595,4245 U3.2 ; U1.8@2472.01,4013.46 C7.1@2568.46,4013.46 ; C7.1 2575,4040 2600.12,4065.12 C8.1 2645,4070.12 v1(2645,4160)
  Bottom Layer w10: v1(2490,4395) 2560,4395 2645,4310 v1(2645,4160)
P5.2_EPIC: U3.4 U9.2 | length 2760.5
  Top Layer w10: U3.4 1902.37,4150 2172.37,4420 v1(2580,4420) ; U9.2@3295,3360.04 v1(3295,3430)
  Bottom Layer w10: v1(2580,4420) 2715,4285 2715,3485 2770,3430 v1(3295,3430)
P5.4_EPIC: R17.1 U3.6 U7.6 U8.6 | length 2174.1
  Top Layer w10: R17.1 U7.6@2408.46,2883.98 ; U7.6 v1(2410,2955) ; v1(2820,2955) 2830,2945 U8.6
  Bottom Layer w10: U3.6 1685,4050 1945,3790 1945,3480 2095,3330 2095,3280 2145,3230 2145,3180 2175,3150 2215,3150 v1(2410,2955) 2420,2955 2430,2945 2810,2945 v1(2820,2955)
P5.7_EPIC: P1.2 U3.9 | length 2119.6
  Top Layer w10: U3.9 1550,3955 1550,4065 1579,4094 1901,4094 2177,4370 2665,4370 2735,4300 2812.37,4300 2872.37,4240 3095,4240 3105,4230 v1(3115,4230)
  Bottom Layer w10: v1(3115,4230) 3272,4230 P1.2
PCM_CLK_BT: U5.5
PCM_IN_BT: U5.7
PCM_OUT_BT: U5.8
PCM_SYNC_BT: U5.6
PIO2_BT: P1.6 U5.14 | length 347
  Top Layer w10: P1.6 U5.14
PIO4_BT: P1.10 U5.16 | length 347
  Top Layer w10: P1.10 U5.16
PIO5_BT: P1.8 U5.15 | length 347
  Top Layer w10: P1.8 U5.15
RADIO_CCA_EPIC: U3.49
RADIO_CS_EPIC: U3.48
RADIO_SFD_EPIC: R5.1 U3.50 | length 103.5
  Top Layer w10: R5.1 U3.50@2793.46,4248.46
RFGND1_EPIC: U3.42
RFGND2_EPIC: U3.44
RFOUT_EPIC: U3.43
RFTXRX_EPIC: U3.45
RST/NMI_EPIC: U3.16
RTS_BT: U5.12
RX_BT: U3.59 U5.10 | length 1177.9
  Top Layer w10: U3.59 2245,4510 2295,4560 2600,4560 2629,4531 2629,4471 2760,4340 2955,4340 3090,4475 U5.10
SCLK0/SCL_EPIC: U3.58 U7.7 U8.7 | length 2355.2
  Top Layer w10: U7.7 v1(2460,2980) ; U8.7 v1(2880,2960)
  Bottom Layer w10: U3.58 2295,4360 2385,4270 2385,3280 2335,3230 2335,3115 2460,2990 v1(2460,2980) 2479,2961 2761,2961 2795,2995 2845,2995 v1(2880,2960)
SPI_CLK_BT: U5.4
SPI_CSB_BT: U5.17
SPI_MISO_BT: U5.18
SPI_MOSI_BT: U5.2
STE0_EPIC: P1.1 U3.55 | length 1044.4
  Top Layer w10: U3.55 2455,4500 2495,4540 2570,4540 2605,4505 2605,4470 2755,4320 2815,4320 2875,4260 3178,4260 P1.1
TCK_EPIC: U3.15
TDI/TCLK_EPIC: U3.13
TDO/TDI_EPIC: U3.12
TMS_EPIC: U3.14
TX_BT: U3.60 U5.11 | length 1316.7
  Top Layer w10: U3.60 2195,4475 2220,4450 v1(2495,4450)
  Bottom Layer w10: v1(2495,4450) 2652.37,4450 2762.37,4340 2995,4340 3190,4535 U5.11
UART1RX_EPIC: U3.62
UART1TX_EPIC: U3.61
VRC: U6.8 U7.3 | length 418.2
  Top Layer w10: U6.8 2025,2860 2035,2870 2035,2877.37 2055,2897.37 2092.37,2897.37 2145,2950 2235,2950 2260,2925 U7.3@2260,2845
VREF+_EPIC: U3.27
VRG: U6.7 U8.3 | length 757.9
  Top Layer w10: U6.7 2044.68,2840.32 v1(2064.37,2860) ; v1(2605,2810) 2645,2810 U8.3@2680,2845
  Bottom Layer w10: v1(2064.37,2860) 2315,2860 2375,2800 2595,2800 v1(2605,2810)
XOSC16IN: U3.64
XOSC16OUT: U3.63
XT2IN_EPIC: C25.2 U3.11 Y1.2 | length 573.9
  Top Layer w10: U3.11 1635,3800 1755,3680 Y1.2@1755,3622 ; Y1.2 Y1.2@1755,3622 ; C25.2 1779.54,3646.54 Y1.2@1755,3622
XT2OUT_EPIC: C24.2 U3.10 Y1.1 | length 361.9
  Top Layer w10: U3.10 Y1.1@1753,3850 ; Y1.1 1755,3878 1759.54,3873.46 C24.2
pads on no net: P1.4 U2.NC U7.1 U7.2 U7.13 U7.14 U7.15 U7.16 U8.1 U8.2 U8.13 U8.14 U8.15 U8.16
copper on no net:
  other v2: 3831.85,2803.15 3890.91,2803.15 3635,3000 3831.85,3196.85 3890.91,3196.85

## Polygon pours and split planes (outlines as drawn)
GND on Top Layer "Top Layer-No Net" (solid): 3500,2940 3500,2810 3760,2810 3760,2940
GND on Top Layer "Top Layer-No Net" (solid): 3297,3098 3297,3218 3295.88,3217 3150,3217 3150,3102 3153.37,3099
GND on Top Layer "Top Layer-No Net" (solid, pour order 1007): 1590,3220 1590,3160 1510,3160 1510,3220
GND on Top Layer "Top Layer-No Net" (solid, remove dead copper, pour order 1006): 1761.17,3100 1520,3100 1520,2920 1754.48,2920
GND on Top Layer "Top Layer-No Net" (solid, pour order 1005): 2685,4000 2685,3800 2555,3800 2555,4000
GND on Top Layer "Top Layer-No Net" (solid, pour order 1004): 2230,3828.07 2230,4014.9 2229.91,4015 2135,4015 2135,3828.07
GND on Top Layer "Top Layer-No Net" (solid, pour order 1003): 2045,3040 2045,2910 2135,2910 2130,2915.2 2130,3040
GND on Top Layer "Top Layer-No Net" (solid, pour order 1002): 1765,2975 1891.38,2975 1893.46,2973.53 1893.46,2891.47 1767.08,2891.47 1765,2890
GND on Top Layer "Top Layer-No Net" (solid, pour order 1001): 2280,3190 2500,3190 2500,2970 2280,2970
GND on Top Layer "Top Layer-No Net" (solid, pour order 1000): 1660,3440 1930,3440 1930,4070 1660,4070
GND on Top Layer "Top Layer-No Net" (solid, pour order 1000): 1850,4250 1675,4250 1675,4475 1850,4475
GND on Top Layer "Top Layer-No Net" (solid, pour order 1001): 2380,2830 2380,2740 1680,2740 1680,2830
GND on Top Layer "Top Layer-No Net" (solid, pour order 1002): 2990,3280 2730,3280 2730,3060 2990,3060
GND on Top Layer "Top Layer-No Net" (solid, pour order 1003): 3110,3710 3520,3710 3520,3560 3120,3560 3110,3568.33
GND on GND (split plane): 3979.61,2720.39 1420.39,2720.39 1420.39,4679.61 2641.55,4679.61 2679.61,4641.55 2679.61,4500 2681.16,4492.2 2685.58,4485.58 2785.58,4385.58 2792.2,4381.16 2800,4379.61 2900,4379.61 2907.8,4381.16 2914.42,4385.58 3014.42,4485.58 3018.84,4492.2 3020.39,4500 3020.39,4641.55 3058.45,4679.61 3979.61,4679.61
AVDD_EPIC on PWR (split plane): 3979.61,2720.39 1420.39,2720.39 1420.39,4679.61 2641.55,4679.61 2679.61,4641.55 2679.61,4500 2681.16,4492.2 2685.58,4485.58 2785.58,4385.58 2792.2,4381.16 2800,4379.61 2900,4379.61 2907.8,4381.16 2914.42,4385.58 3014.42,4485.58 3018.84,4492.2 3020.39,4500 3020.39,4641.55 3058.45,4679.61 3979.61,4679.61

## Keep-outs
Keep-Out Layer:
  lines w10: 1435,2740 1435,4650 2650,4650 2650,4480 2770,4360 2950,4360 3050,4460 3050,4650 3950,4650 3950,2740 1435,2740

## Silkscreen, mask and mechanical layers (free items; w line width, h text height)
Top Overlay:
  text "No MONO Plugs!" at 3470,3335 h20
  text "or you short the circuit!" at 3465,3295 h20
Mechanical 13:
  lines w10: 1435,2740 1435,4650 3950,4650 3950,2740 1435,2740
Mechanical 15:
  lines w10: 1400,2700 1400,4700 2650,4700 2700,4650 2700,4600 2700,4500 2800,4400 2900,4400 3000,4500 3000,4600 3000,4650 3050,4700 3100,4700 4000,4700 4000,2700 1400,2700

## Dimensions
1435,4650 to 1435,2740 on Mechanical 13
1435,2740 to 3950,2740 on Mechanical 13

## Text inside footprints (layer, text, board x,y; h text height)
P1: Top Overlay "1" at 3210,4128 h20
U3: Top Overlay "52" at 2615,4500 h30; Top Overlay "35" at 2765,3460 h30; Top Overlay "51" at 2775,4315 h30; Top Overlay "18" at 1745,3260 h30; Top Overlay "34" at 2605,3260 h30; Top Overlay "1" at 1560,4320 h30; Top Overlay "17" at 1555,3460 h30
U5: Top Overlay "1" at 3885,3860 h30; Top Overlay "ANT" at 3810,4245 h60 r270